# Altium PCB led_matrix_serial.PcbDoc
Units mm, origin at the board's own origin, x right, y up, seen from the top; angles counter-clockwise.
Board outline 70 x 57 mm, 2 copper layers (Top Layer, Bottom Layer); 36 components, 74 nets, 243 pads, 64 vias.
Unrouted connection lines stored in the file: 21.
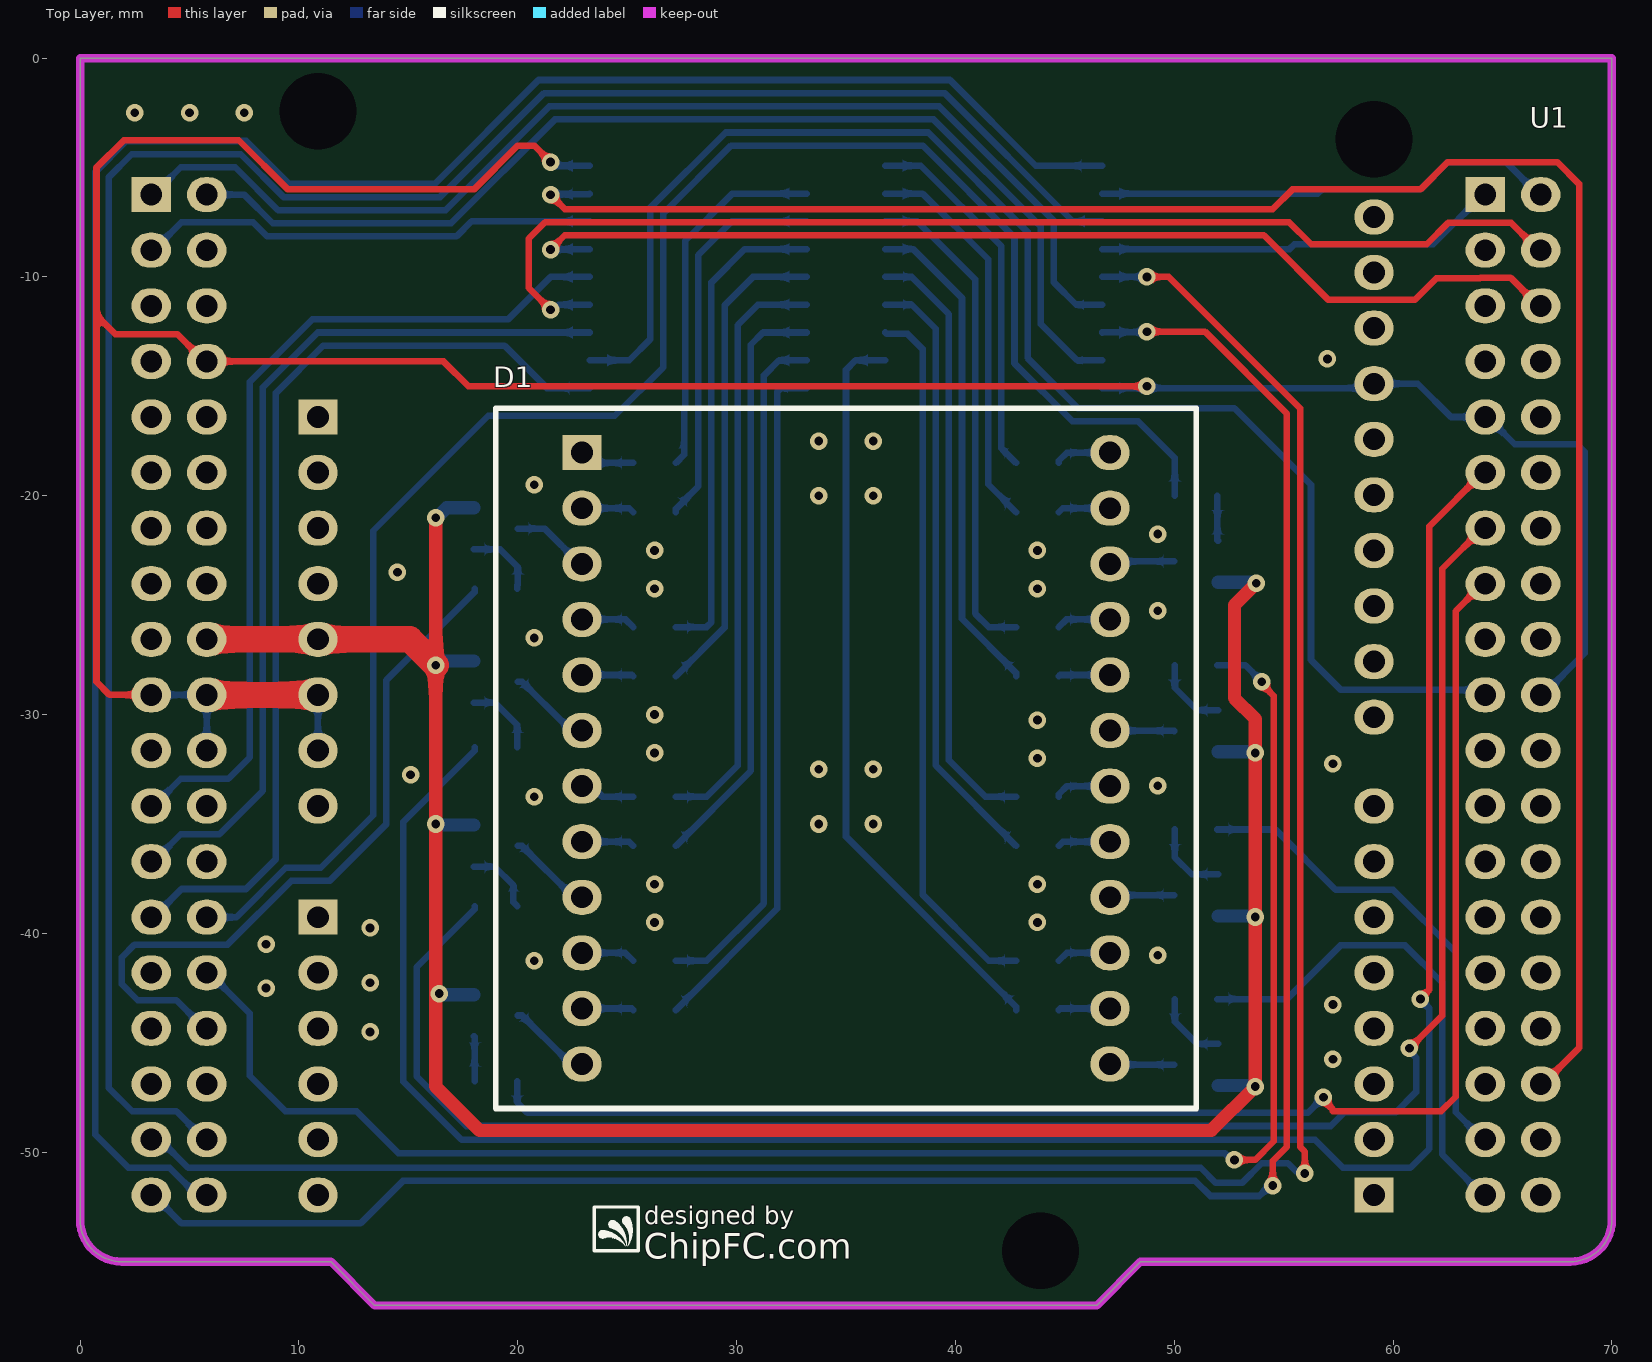
[diagram p0: Top Layer view]
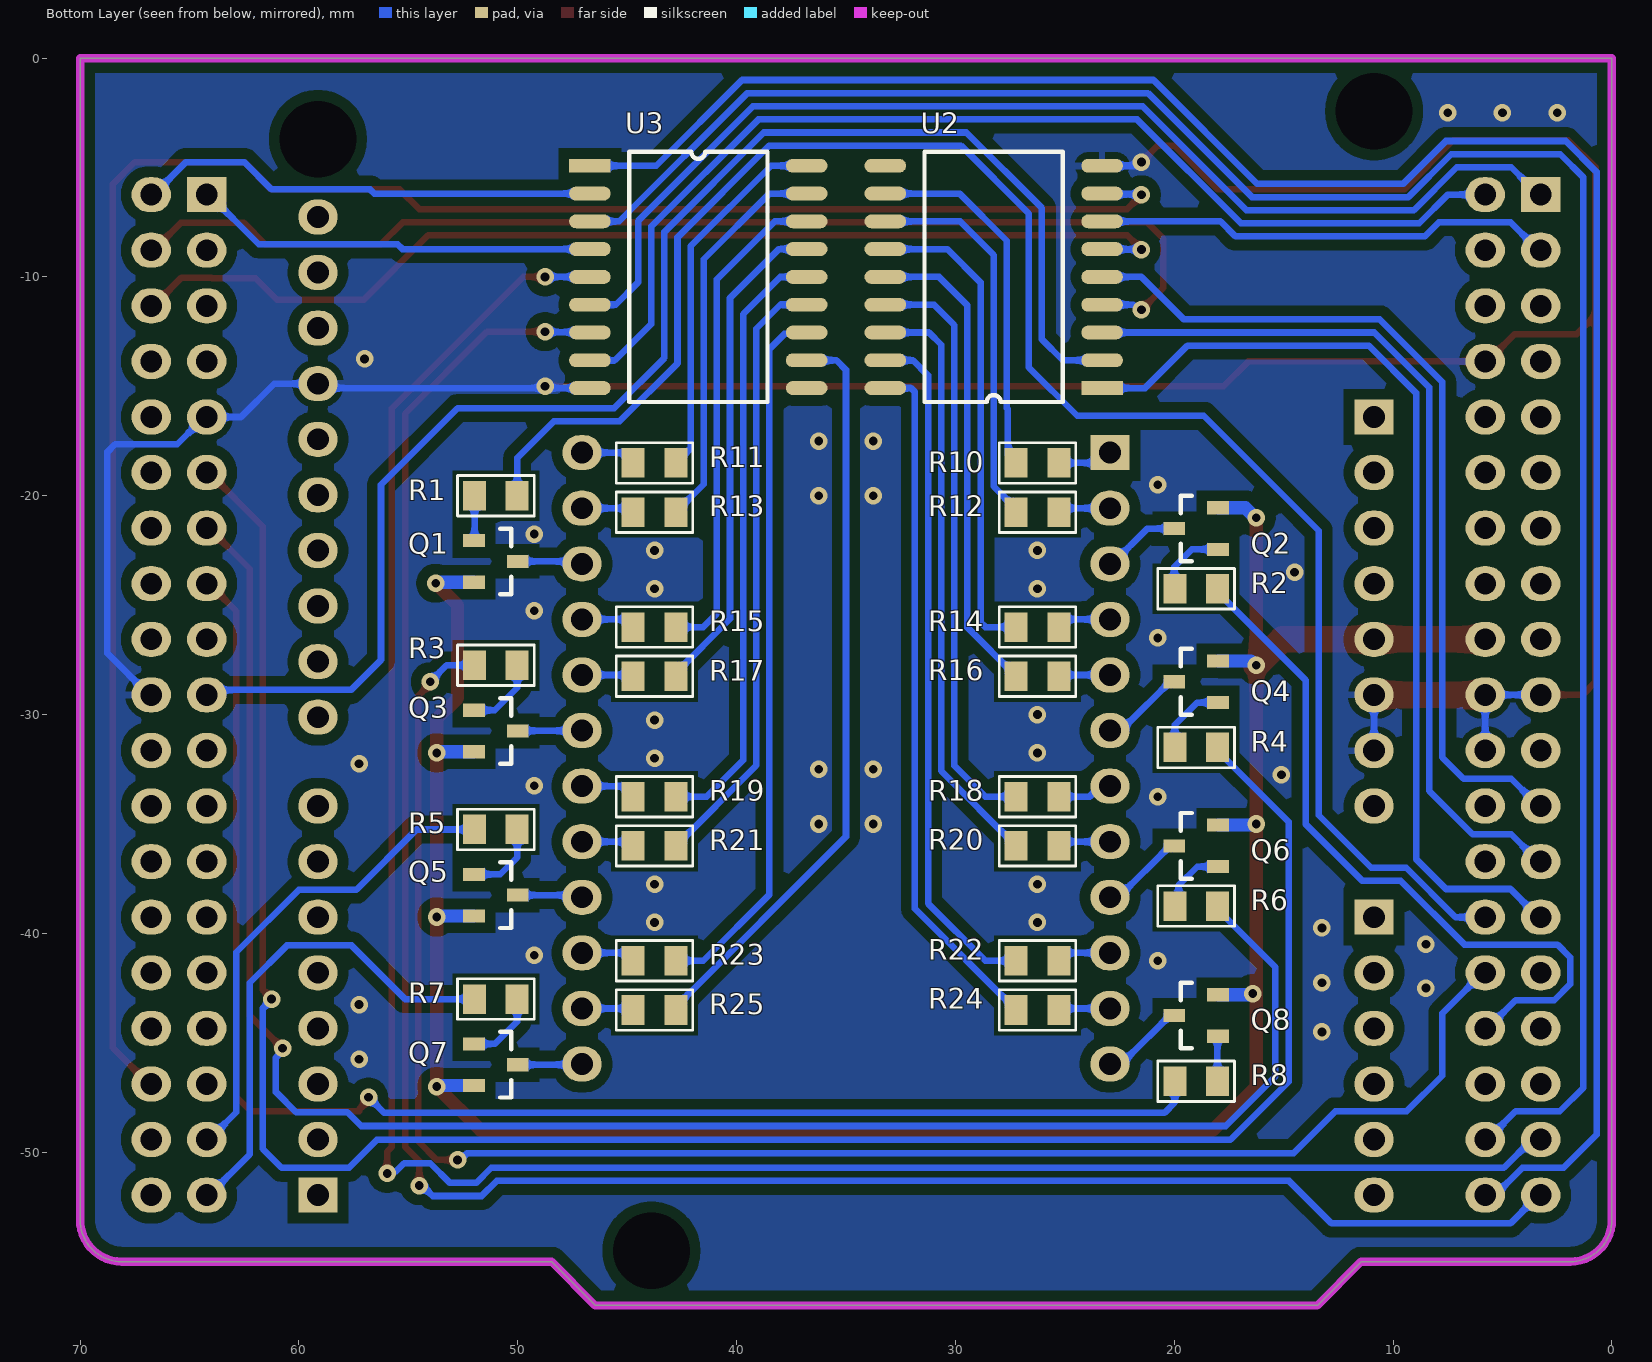
[diagram p1: Bottom Layer view, seen from below]
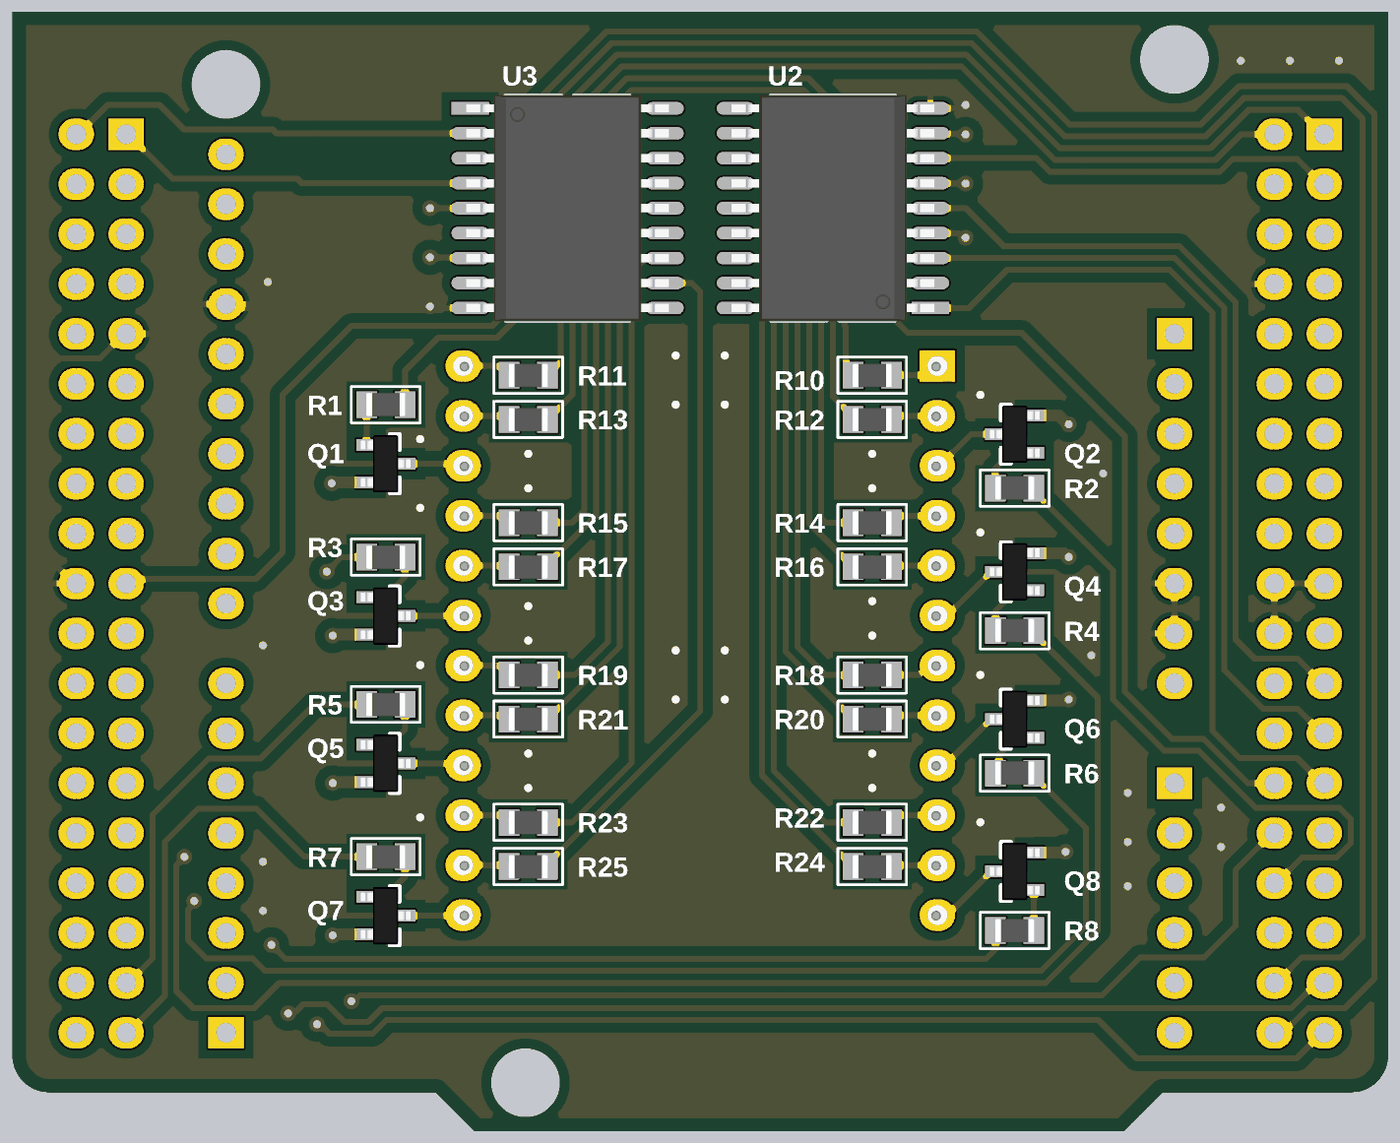
[diagram p2: 3D render of the assembled board from below, using the file's embedded part models]

## Layer stack, top to bottom
Top Solder: solder mask 0.0102, Solder Resist, Dk 3.5
Top Layer: signal copper 0.0356
Dielectric 1: dielectric 0.32, FR-4, Dk 4.8
Bottom Layer: signal copper 0.0356
Bottom Solder: solder mask 0.0102, Solder Resist, Dk 3.5

## Board outline
1.905,-55 11.46,-55 13.46,-57 46.46,-57 48.46,-55 68.095,-55 ccw(c68.095,-53.095) 70,-53.095 70,0 0,0 0,-53.095 ccw(c1.905,-53.095)

## Design rules (kind name [scope] priority, off if disabled: settings)
Clearance Clearance_3 [InComponent('H*')] p1: gap=0 ignorepadtopadclearanceinfootprint=FALSE
Clearance Clearance_2 [InNet('ACL*') OR InNet('ACN*')] p2: gap=0.35 ignorepadtopadclearanceinfootprint=FALSE except(0: Arc-Hole Track-Hole SMDPad-Hole THPad-Hole Via-Hole Fill-Hole Poly-Hole Region-Hole Text-Hole)
Clearance Clearance_1 [InPolygon] p3: gap=0.5 ignorepadtopadclearanceinfootprint=FALSE except(0: Arc-Hole Track-Hole SMDPad-Hole THPad-Hole Via-Hole Fill-Hole Poly-Hole Region-Hole Text-Hole)
Clearance [All] p4: gap=0.3 ignorepadtopadclearanceinfootprint=FALSE except(0: Arc-Hole Track-Hole SMDPad-Hole THPad-Hole Via-Hole Fill-Hole Poly-Hole Region-Hole Text-Hole)
ComponentClearance ComponentClearance_1 [InComponent('U1')] p1: gap=0 collisioncheckmode=3 verticalgap=0 showdistances=FALSE
ComponentClearance [All] p2: gap=0.254 collisioncheckmode=3 verticalgap=0.254 showdistances=FALSE
Height [All] p1: minheight=0 maxheight=30 prefheight=12.7
PolygonConnect PolygonConnect_1 [IsVia] p1: connectstyle=Direct reliefconductorwidth=0.254 reliefentries=4 polygonreliefangle="90 Angle" airgapwidth=0.254
PolygonConnect PolygonConnect_2 [InNet('GND')] p2: connectstyle=Relief reliefconductorwidth=0.3 reliefentries=4 polygonreliefangle="90 Angle" airgapwidth=0.3
PolygonConnect [All] p3: connectstyle=Relief reliefconductorwidth=0.381 reliefentries=4 polygonreliefangle="90 Angle" airgapwidth=0.635
RoutingVias [All] p1: holewidth=0.4 width=0.8 viastyle="Through Hole" minholewidth=0.3 minwidth=0.6 maxholewidth=2 maxwidth=5
SolderMaskExpansion [All] p1: expansion=0.102
Width [All] p1: maxlimit=50 minlimit=0.2 preferedwidth=0.3
28 further rules are at their usual default settings.

## Components (designator, comment, footprint, x,y, rotation, side; value= is the part's Value field where it differs from the comment)
D1 "1388AURG" LED/MATRIX/1388 35,-32 r270 top locked
Q1 "Transistor PNP" SOT-23 51,-23 r180 bottom
Q2 "Transistor PNP" SOT-23 19,-21.5 r0 bottom
Q3 "Transistor PNP" SOT-23 51,-30.75 r180 bottom
Q4 "Transistor PNP" SOT-23 19,-28.5 r0 bottom
Q5 "Transistor PNP" SOT-23 51,-38.25 r180 bottom
Q6 "Transistor PNP" SOT-23 19,-36 r0 bottom
Q7 "Transistor PNP" SOT-23 51,-46 r180 bottom
Q8 "Transistor PNP" SOT-23 19,-43.75 r0 bottom
R1 "4.7K" "R 0805" 51,-20 r0 bottom
R2 "4.7K" "R 0805" 19,-24.25 r0 bottom
R3 "4.7K" "R 0805" 51,-27.75 r180 bottom
R4 "4.7K" "R 0805" 19,-31.5 r0 bottom
R5 "4.7K" "R 0805" 51,-35.25 r180 bottom
R6 "4.7K" "R 0805" 19,-38.75 r0 bottom
R7 "4.7K" "R 0805" 51,-43 r180 bottom
R8 "4.7K" "R 0805" 19,-46.75 r180 bottom
R10 "330" "R 0805" 26.25,-18.5 r180 bottom
R11 "330" "R 0805" 43.75,-18.5 r180 bottom
R12 "470" "R 0805" 26.25,-20.75 r180 bottom
R13 "470" "R 0805" 43.75,-20.75 r180 bottom
R14 "330" "R 0805" 26.25,-26 r180 bottom
R15 "330" "R 0805" 43.75,-26 r180 bottom
R16 "470" "R 0805" 26.25,-28.25 r180 bottom
R17 "470" "R 0805" 43.75,-28.25 r180 bottom
R18 "330" "R 0805" 26.25,-33.75 r180 bottom
R19 "330" "R 0805" 43.75,-33.75 r180 bottom
R20 "470" "R 0805" 26.25,-36 r180 bottom
R21 "470" "R 0805" 43.75,-36 r180 bottom
R22 "330" "R 0805" 26.25,-41.25 r180 bottom
R23 "330" "R 0805" 43.75,-41.25 r180 bottom
R24 "470" "R 0805" 26.25,-43.5 r180 bottom
R25 "470" "R 0805" 43.75,-43.5 r180 bottom
U1 "NUCLEO-F103RB" NUCLEO 0,-55 r0 top locked
U2 "ULN2803" "SOP 18 50p" 28.25,-10 r0 bottom
U3 "ULN2803" "SOP 18 50p" 41.75,-10 r180 bottom

## Footprints (in the part's own frame and the unit in brackets; to place one, negate y for a bottom-side part, rotate by r counter-clockwise, add the part's x,y. Pads: shape width x height; smd on the part's side, far side on the other; paste and mask are expansions set on the pad)
LED/MATRIX/1388 [mm]
  rect 1.6x1.8 hole 1: 1(-13.97,-12.065)
  oval 1.6x1.8 hole 1: 2(-11.43,-12.065) 3(-8.89,-12.065) 4(-6.35,-12.065) 5(-3.81,-12.065) 6(-1.27,-12.065) 7(1.27,-12.065) 8(3.81,-12.065) 9(6.35,-12.065) 10(8.89,-12.065) 11(11.43,-12.065) 12(13.97,-12.065) 13(13.97,12.065) 14(11.43,12.065) 15(8.89,12.065) 16(6.35,12.065) 17(3.81,12.065) 18(1.27,12.065) 19(-1.27,12.065) 20(-3.81,12.065) 21(-6.35,12.065) 22(-8.89,12.065) 23(-11.43,12.065) 24(-13.97,12.065)
  silkscreen extent -16,-16 16,16, body extent -16,-16 16,16, height 8
NUCLEO [mm]
  oval 1.8x1.6 hole 1: A5_1(59.13,24.88) A5_2(59.13,27.42) A5_3(59.13,29.96) A5_4(59.13,32.5) A5_5(59.13,35.04) A5_6(59.13,37.58) A5_7(59.13,40.12) A5_8(59.13,42.66) A5_9(59.13,45.2) A5_10(59.13,47.74) A6_2(10.87,36.06) A6_3(10.87,33.52) A6_4(10.87,30.98) A6_5(10.87,28.44) A6_6(10.87,25.9) A6_7(10.87,23.36) A6_8(10.87,20.82) A8_2(10.87,13.2) A8_3(10.87,10.66) A8_4(10.87,8.12) A8_5(10.87,5.58) A8_6(10.87,3.04) A9_2(59.13,5.58) A9_3(59.13,8.12) A9_4(59.13,10.66) A9_5(59.13,13.2) A9_6(59.13,15.74) A9_7(59.13,18.28) A9_8(59.13,20.82) M7_2(5.79,48.76) M7_3(3.25,46.22) M7_4(5.79,46.22) M7_5(3.25,43.68) M7_6(5.79,43.68) M7_7(3.25,41.14) M7_8(5.79,41.14) M7_9(3.25,38.6) M7_10(5.79,38.6) M7_11(3.25,36.06) M7_12(5.79,36.06) M7_13(3.25,33.52) M7_14(5.79,33.52) M7_15(3.25,30.98) M7_16(5.79,30.98) M7_17(3.25,28.44) M7_18(5.79,28.44) M7_19(3.25,25.9) M7_20(5.79,25.9) M7_21(3.25,23.36) M7_22(5.79,23.36) M7_23(3.25,20.82) M7_24(5.79,20.82) M7_25(3.25,18.28) M7_26(5.79,18.28) M7_27(3.25,15.74) M7_28(5.79,15.74) M7_29(3.25,13.2) M7_30(5.79,13.2) M7_31(3.25,10.66) M7_32(5.79,10.66) M7_33(3.25,8.12) M7_34(5.79,8.12) M7_35(3.25,5.58) M7_36(5.79,5.58) M7_37(3.25,3.04) M7_38(5.79,3.04) M10_2(66.75,48.76) M10_3(64.21,46.22) M10_4(66.75,46.22) M10_5(64.21,43.68) M10_6(66.75,43.68) M10_7(64.21,41.14) M10_8(66.75,41.14) M10_9(64.21,38.6) M10_10(66.75,38.6) M10_11(64.21,36.06) M10_12(66.75,36.06) M10_13(64.21,33.52) M10_14(66.75,33.52) M10_15(64.21,30.98) M10_16(66.75,30.98) M10_17(64.21,28.44) M10_18(66.75,28.44) M10_19(64.21,25.9) M10_20(66.75,25.9) M10_21(64.21,23.36) M10_22(66.75,23.36) M10_23(64.21,20.82) M10_24(66.75,20.82) M10_25(64.21,18.28) M10_26(66.75,18.28) M10_27(64.21,15.74) M10_28(66.75,15.74) M10_29(64.21,13.2) M10_30(66.75,13.2) M10_31(64.21,10.66) M10_32(66.75,10.66) M10_33(64.21,8.12) M10_34(66.75,8.12) M10_35(64.21,5.58) M10_36(66.75,5.58) M10_37(64.21,3.04) M10_38(66.75,3.04)
  rect 1.8x1.6 hole 1: A6_1(10.87,38.6) A8_1(10.87,15.74) A9_1(59.13,3.04) M7_1(3.25,48.76) M10_1(64.21,48.76)
  round 0 hole 3.5 unplated: HOLD(10.87,52.57) HOLD(43.89,0.5) HOLD(59.13,51.3)
  Keep-Out Layer lines w0.381: 0,1.905 ccw(c1.905,1.905) 1.905,0 11.46,0 13.46,-2 46.46,-2 48.46,0 68.095,0 ccw(c68.095,1.905) 70,1.905 70,55 0,55 0,1.905
"R 0805" [mm] "Chip Resistor, 2-Leads, Body 2.0x1.3mm, IPC Medium Density"
  rect 1.05x1.35 smd: 1(-0.975,0) 2(0.975,0)
  silkscreen extent -1.75,-0.92 1.75,0.92, body extent -1,-0.61 1,0.59, height 0.5
"SOP 18 50p" [mil]
  rect 75x25 smd: 1(-195,200)
  oval 75x25 smd: 2(-195,150) 3(-195,100) 4(-195,50) 5(-195,0) 6(-195,-50) 7(-195,-100) 8(-195,-150) 9(-195,-200) 10(195,-200) 11(195,-150) 12(195,-100) 13(195,-50) 14(195,0) 15(195,50) 16(195,100) 17(195,150) 18(195,200)
  silkscreen extent -124,-225 124,225, body extent -203,-227 203,227, height 104
SOT-23 [mm] "SOT23, 3-Leads, Body 3.0x2.5mm (max), Pitch 0.95mm, IPC Medium Density"
  rect 1x0.6 smd: 1(-1,0.95) 2(-1,-0.95) 3(1,0)
  silkscreen extent 0.2,-1.5 0.7,1.5, body extent -1.28,-1.46 1.27,1.46, height 0.95

## Part data
D1: library part "LED MATRIX 1388AURG", "1388AURG, Common-Anode, LED Matrix 8x8, RED-GREEN, 32x32mm"
Q1 Q2 Q3 Q4 Q5 Q6 Q7 Q8: "PNP Bipolar Transistor"
R1 R2 R3 R4 R5 R6 R7 R8 R10 R11 R12 R13 R14 R15 R16 R17 R18 R19 R20 R21 R22 R23 R24 R25: library part Resistor, "Resistor"
U1: "STM32F103RB, mbed-Enabled Development Nucleo-64 STM32F1 ARM® Cortex®-M3 MCU 32-Bit Embedded Evaluation Board", Manufacturer=STMicroelectronics, BRAND=STMicroelectronics, Manufacturer Product Number=NUCLEO-F103RB, PART NO=NUCLEO-F103RB, STOCK CODE=497-14362-ND, SUPPLIER=digi-key, TYPE="EVAL BRD"
U2 U3: "TRANS 8NPN DARL 50V 0.5A 18SO", PACKAGE=18-SOIC, PART NO=ULN2803ADWR, BRAND=TI, STOCK CODE=296-15777-1-ND, SUPPLIER=Digi-Key, TYPE=SMD

## Via types
v1: diameter 0.8, hole 0.4, Top Layer to Bottom Layer, tented both sides, 64 vias

## Nets (pads, with @x,y where several pads share a name; then routed paths per layer and width w, separated by ;. In a path a pad name is that pad's centre, name@x,y a point inside that pad or via, vN(x,y) a via of type N, cw(c..) or ccw(c..) an arc to the next point about the centre after c; other vN are vias at no path point)
+5V: Q1.2 Q2.2 Q3.2 Q4.2 Q5.2 Q6.2 Q7.2 Q8.2 U1.A6_5 U1.M7_18 | length 114.1
  Top Layer w0.6: v1(16.25,-21) v1(16.25,-27.75) v1(16.25,-35) v1@16.25,-42.75 ; v1(16.412,-42.75) v1@16.25,-42.75 ; v1(53.75,-24) 52.75,-25 52.75,-29.25 53.7,-30.2 v1(53.7,-31.75) v1(53.7,-39.25) v1(53.7,-47) 51.7,-49 18.25,-49 16.25,-47 v1@16.25,-42.75
  Top Layer w1.2: U1.M7_18 U1.A6_5 15.06,-26.56 v1(16.25,-27.75)
  Bottom Layer w0.6: v1(16.25,-35) 16.304,-35 16.354,-35.05 Q6.2 ; v1(16.25,-27.75) 16.304,-27.75 16.504,-27.55 Q4.2 ; v1(16.25,-21) 16.304,-21 16.754,-20.55 Q2.2 ; v1(16.412,-42.75) 16.412,-42.8 Q8.2 ; Q7.2 53.596,-46.95 53.646,-47 v1(53.7,-47) ; Q5.2 53.596,-39.2 53.646,-39.25 v1(53.7,-39.25) ; Q3.2 53.596,-31.7 53.646,-31.75 v1(53.7,-31.75) ; Q1.2 53.646,-23.95 53.696,-24 v1(53.75,-24)
CG1: U1.M7_38 U3.1 | length 101.2
  Bottom Layer w0.3: U1.M7_38 5.338,-51.96 4.088,-50.71 2.21,-50.71 0.7,-49.2 0.7,-5.201 2.111,-3.79 7.586,-3.79 9.546,-5.75 16.204,-5.75 20.954,-1 39.75,-1 43.67,-4.92 U3.1
CG2: U1.M7_36 U3.3 | length 98.1
  Bottom Layer w0.3: U1.M7_36 5.69,-49.42 4.4,-48.13 2.38,-48.13 1.3,-47.05 1.3,-5.45 2.36,-4.39 7.337,-4.39 9.297,-6.35 16.453,-6.35 16.953,-5.85 21.203,-1.6 39.501,-1.6 45.361,-7.46 U3.3
CG3: U1.M7_35 U3.5 | length 100.7
  Top Layer w0.3: v1(48.75,-10) 49.75,-10 55.75,-16 55.75,-49.75 55.968,-49.968 v1(55.968,-50.968)
  Bottom Layer w0.3: U1.M7_35 3.647,-49.42 4.937,-50.71 51.21,-50.71 51.9,-51.4 53.1,-51.4 54,-50.5 55.193,-50.5 55.565,-50.872 55.872,-50.872 v1(55.968,-50.968) ; U3.5 v1(48.75,-10)
CG4: U1.M7_37 U3.7 | length 98.6
  Top Layer w0.3: v1(48.75,-12.5) 51.401,-12.5 55.15,-16.249 55.15,-49.75 54.5,-50.4 v1(54.5,-51.52)
  Bottom Layer w0.3: U1.M7_37 3.35,-51.96 4.64,-53.25 12.81,-53.25 14.75,-51.31 50.961,-51.31 51.651,-52 53.885,-52 54.365,-51.52 v1(54.5,-51.52) ; U3.7 46.723,-12.52 48.73,-12.52 v1(48.75,-12.5)
CG5: U1.M10_34 U2.8 | length 92.3
  Top Layer w0.3: v1(21.5,-6.25) 22.15,-6.9 54.5,-6.9 55.4,-6 61.25,-6 62.5,-4.75 67.5,-4.75 68.5,-5.75 68.5,-45.23 66.85,-46.88 U1.M10_34
  Bottom Layer w0.3: v1(21.5,-6.25) 21.53,-6.22 23.267,-6.22 U2.8
CG6: U1.M10_6 U2.6 | length 49.5
  Top Layer w0.3: v1(21.5,-8.75) 22.15,-8.1 54.1,-8.1 57.05,-11.05 60.99,-11.05 61.97,-10.07 63.96,-10.07 64,-10.03 65.36,-10.03 66.65,-11.32 U1.M10_6
  Bottom Layer w0.3: v1(21.5,-8.75) 21.51,-8.74 23.287,-8.74 U2.6
CG7: U1.M10_4 U2.4 | length 53.5
  Top Layer w0.3: v1(21.5,-11.5) 20.5,-10.5 20.5,-8.25 21.25,-7.5 55.25,-7.5 56.26,-8.51 61.534,-8.51 62.514,-7.53 65.4,-7.53 66.65,-8.78 U1.M10_4
  Bottom Layer w0.3: v1(21.5,-11.5) 21.635,-11.5 21.865,-11.27 U2.4
CG8: U1.M10_19 U2.2 | length 67.4
  Bottom Layer w0.3: U2.2 25.091,-13.81 26.046,-12.855 26.046,-6.855 29.501,-3.4 38.756,-3.4 43.3,-7.944 43.3,-13.701 45.599,-16 52.75,-16 56.25,-19.5 56.25,-27.5 57.62,-28.87 63.98,-28.87 U1.M10_19
CR1: U1.M10_2 U3.2 | length 21.3
  Bottom Layer w0.3: U3.2 56.56,-6.19 56.75,-6 61.25,-6 62.5,-4.75 65.16,-4.75 66.65,-6.24 U1.M10_2
CR2: U1.M10_1 U3.4 | length 18.5
  Bottom Layer w0.3: U3.4 55.27,-8.73 55.49,-8.51 61.84,-8.51 64.11,-6.24 U1.M10_1
CR3: U1.M7_1 U3.6 | length 52.1
  Bottom Layer w0.3: U1.M7_1 3.35,-6.24 4.6,-4.99 7.089,-4.99 9.049,-6.95 16.701,-6.95 21.451,-2.2 39.253,-2.2 44.5,-7.447 44.5,-10.25 45.52,-11.27 U3.6
CR4: U1.M7_2 U3.8 | length 50.6
  Bottom Layer w0.3: U1.M7_2 7.49,-6.24 8.8,-7.55 16.95,-7.55 21.7,-2.8 39.004,-2.8 43.9,-7.696 43.9,-12.15 45.56,-13.81 U3.8
CR5: U1.M7_3 U2.7 | length 21.1
  Bottom Layer w0.3: U1.M7_3 3.35,-8.78 4.63,-7.5 7.901,-7.5 8.551,-8.15 17.199,-8.15 17.889,-7.46 U2.7
CR6: U1.M7_23 U2.5 | length 40.1
  Bottom Layer w0.3: U1.M7_23 3.35,-34.18 4.6,-32.93 6.779,-32.93 7.75,-31.959 7.75,-14.803 10.613,-11.94 19.56,-11.94 21.5,-10 U2.5
CR7: U1.M7_25 U2.3 | length 40.9
  Bottom Layer w0.3: U1.M7_25 3.35,-36.72 4.6,-35.47 6.368,-35.47 8.35,-33.488 8.35,-15.051 10.861,-12.54 U2.3
CR8: U1.M7_27 U2.1 | length 44.1
  Bottom Layer w0.3: U1.M7_27 3.35,-39.26 4.64,-37.97 7.583,-37.97 8.95,-36.603 8.95,-15.3 11.11,-13.14 19.39,-13.14 21.33,-15.08 U2.1
CROW1: R1.1 U1.M7_28 | length 81.6
  Bottom Layer w0.3: U1.M7_28 7.141,-39.26 9.401,-37 11,-37 13.4,-34.6 13.4,-21.6 18.653,-16.347 24.436,-16.347 26.646,-14.137 26.646,-7.104 29.75,-4 38.507,-4 42.7,-8.193 42.7,-13.95 45.35,-16.6 48.35,-16.6 50.025,-18.275 R1.1
CROW2: R3.1 U1.M7_30 | length 78
  Top Layer w0.3: U1.M7_30 U1.M7_30@5.89,-41.8 ; v1(52.75,-50.35) 53.701,-50.35 54.55,-49.501 54.55,-29.152 54,-28.602 v1(54,-28.5)
  Bottom Layer w0.3: U1.M7_30 5.89,-41.8 7.75,-43.66 7.75,-46.5 9.38,-48.13 12.63,-48.13 14.541,-50.041 52.306,-50.041 52.615,-50.35 v1(52.75,-50.35) ; R3.1 53.25,-27.75 v1(54,-28.5)
CROW3: R5.1 U1.M10_35 | length 22.4
  Bottom Layer w0.3: R5.1 54.625,-35.25 57.375,-38 60,-38 62.86,-40.86 62.86,-48.17 64.11,-49.42 U1.M10_35
CROW4: R7.1 U1.M10_37 | length 22.6
  Bottom Layer w0.3: R7.1 55.149,-43 57.599,-40.55 60.55,-40.55 62.25,-42.25 62.25,-50.1 64.11,-51.96 U1.M10_37
CROW5: R2.1 U1.M7_32 | length 33
  Bottom Layer w0.3: U1.M7_32 5.69,-44.34 4.4,-43.05 2.632,-43.05 1.9,-42.318 1.9,-41.1 2.49,-40.51 6.74,-40.51 9.65,-37.6 11.4,-37.6 14,-35 14,-28.425 18.025,-24.4 R2.1
CROW6: R4.1 U1.M10_11 | length 97.8
  Top Layer w0.3: v1(61.25,-43) 61.25,-42.974 61.65,-42.574 61.65,-21.4 64.11,-18.94 U1.M10_11
  Bottom Layer w0.3: R4.1 18.025,-31.65 14.776,-34.899 14.776,-46.776 17.431,-49.431 56.431,-49.431 57.71,-50.71 60.79,-50.71 61.65,-49.85 61.65,-43.426 61.25,-43.026 v1(61.25,-43)
CROW7: R6.1 U1.M10_13 | length 83.5
  Top Layer w0.3: v1(60.75,-45.25) 62.25,-43.75 62.25,-23.34 64.11,-21.48 U1.M10_13
  Bottom Layer w0.3: R6.1 18.025,-38.9 15.376,-41.549 15.376,-46.527 17.649,-48.8 57.152,-48.8 57.782,-48.17 60.13,-48.17 61.05,-47.25 61.05,-45.676 60.75,-45.376 v1(60.75,-45.25)
CROW8: R8.1 U1.M10_15 | length 69.1
  Top Layer w0.3: v1(56.818,-47.484) 56.818,-47.619 57.25,-48.051 57.25,-48.13 62.194,-48.13 62.86,-47.464 62.86,-25.27 64.11,-24.02 U1.M10_15
  Bottom Layer w0.3: R8.1 19.975,-47.725 20.45,-48.2 56.102,-48.2 v1(56.818,-47.484)
G1: R11.2 U3.18 | length 17
  Bottom Layer w0.3: U3.18 38.42,-4.92 42.1,-8.6 42.1,-17.825 R11.2
G2: R15.2 U3.16 | length 22.6
  Bottom Layer w0.3: U3.16 38.25,-7.46 40.9,-10.11 40.9,-25.376 41.524,-26 R15.2
G3: R19.2 U3.14 | length 27.8
  Bottom Layer w0.3: U3.14 38,-10 39.7,-11.7 39.7,-32.076 41.374,-33.75 R19.2
G4: R23.2 U3.12 | length 32.5
  Bottom Layer w0.3: U3.12 36.861,-12.604 37.814,-12.604 38.5,-13.29 38.5,-38.226 41.524,-41.25 R23.2
G5: R10.1 U2.11 | length 16.8
  Bottom Layer w0.3: R10.1 27.6,-18.125 27.6,-16.05 27.65,-16 27.65,-8.35 29.81,-6.19 U2.11
G6: R14.1 U2.13 | length 22.2
  Bottom Layer w0.3: R14.1 28.626,-26 28.85,-25.776 28.85,-10.25 30.37,-8.73 U2.13
G7: R18.1 U2.15 | length 27.1
  Bottom Layer w0.3: R18.1 28.626,-33.75 30.05,-32.326 30.05,-12.2 30.98,-11.27 U2.15
G8: R22.1 U2.17 | length 31.5
  Bottom Layer w0.3: R22.1 28.626,-41.25 31.25,-38.626 31.25,-14.5 31.94,-13.81 U2.17
GND: U1.A5_7 U1.A6_6 U1.A6_7 U1.M7_8 U1.M7_19 U1.M7_20 U1.M7_22 U1.M10_9 U1.M10_20 U2.9 U3.9 | length 148.9
  Top Layer w0.3: U1.M7_19 1.35,-29.1 0.75,-28.5 0.75,-11.75 ; v1(21.5,-4.75) 20.75,-4 20,-4 18,-6 9.5,-6 7.25,-3.75 2,-3.75 0.75,-5 0.75,-11.75 ; v1(48.75,-15) 17.75,-15 16.61,-13.86 5.69,-13.86 4.44,-12.61 1.61,-12.61 0.75,-11.75
  Top Layer w1.2: U1.M7_20 U1.A6_6
  Bottom Layer w0.3: U1.M7_19 U1.M7_20 U1.M7_22 ; U1.A6_7 U1.A6_6 ; v1(21.5,-4.75) 21.635,-4.75 21.805,-4.92 U2.9 ; U3.9 58.93,-15.08 U1.A5_7 61.13,-14.88 62.65,-16.4 U1.M10_9 64.31,-16.4 65.56,-17.65 68.4,-17.65 68.75,-18 68.75,-27.2 66.85,-29.1 U1.M10_20
  other v1: 57.25,-45.75 13.25,-44.5 57.25,-43.25 8.5,-42.5 13.25,-42.25 20.75,-41.25 49.25,-41 8.5,-40.5 13.25,-39.75 26.25,-39.5 43.75,-39.5 26.25,-37.75 43.75,-37.75 33.75,-35 36.25,-35 20.75,-33.75 49.25,-33.25 15.1,-32.75 33.75,-32.5 36.25,-32.5 57.25,-32.25 43.75,-32 26.25,-31.75 43.75,-30.25 26.25,-30 20.75,-26.5 49.25,-25.25 26.25,-24.25 43.75,-24.25 14.5,-23.5 26.25,-22.5 43.75,-22.5 49.25,-21.75 33.75,-20 36.25,-20 20.75,-19.5 33.75,-17.5 36.25,-17.5 57,-13.75 2.5,-2.5 5,-2.5 7.5,-2.5
NetD1_1: D1.1 R10.2 | length 2.5
  Bottom Layer w0.3: D1.1 23.405,-18.5 R10.2
NetD1_2: D1.2 R12.2 | length 2.4
  Bottom Layer w0.3: D1.2 25.095,-20.57 R12.2
NetD1_4: D1.4 R14.2 | length 2.5
  Bottom Layer w0.3: D1.4 24.925,-25.65 R14.2
NetD1_5: D1.5 R16.2 | length 2.4
  Bottom Layer w0.3: D1.5 25.215,-28.19 R16.2
NetD1_7: D1.7 R18.2 | length 2.5
  Bottom Layer w0.3: D1.7 23.387,-33.27 23.867,-33.75 R18.2
NetD1_8: D1.8 R20.2 | length 2.4
  Bottom Layer w0.3: D1.8 25.085,-35.81 R20.2
NetD1_10: D1.10 R22.2 | length 2.5
  Bottom Layer w0.3: D1.10 24.915,-40.89 R22.2
NetD1_11: D1.11 R24.2 | length 2.4
  Bottom Layer w0.3: D1.11 25.205,-43.43 R24.2
NetD1_14: D1.14 R25.1 | length 2.4
  Bottom Layer w0.3: R25.1 44.795,-43.43 D1.14
NetD1_15: D1.15 R23.1 | length 2.5
  Bottom Layer w0.3: R23.1 45.085,-40.89 D1.15
NetD1_17: D1.17 R21.1 | length 2.4
  Bottom Layer w0.3: R21.1 44.915,-35.81 D1.17
NetD1_18: D1.18 R19.1 | length 2.6
  Bottom Layer w0.3: R19.1 44.725,-33.645 45.1,-33.27 D1.18
NetD1_20: D1.20 R17.1 | length 2.4
  Bottom Layer w0.3: R17.1 44.785,-28.19 D1.20
NetD1_21: D1.21 R15.1 | length 2.5
  Bottom Layer w0.3: R15.1 45.075,-25.65 D1.21
NetD1_23: D1.23 R13.1 | length 2.4
  Bottom Layer w0.3: R13.1 44.905,-20.57 D1.23
NetD1_24: D1.24 R11.1 | length 2.6
  Bottom Layer w0.3: R11.1 44.725,-18.405 45.1,-18.03 D1.24
NetQ1_1: Q1.1 R1.2 | length 2.1
  Bottom Layer w0.3: R1.2 51.975,-22.025 Q1.1
NetQ2_1: Q2.1 R2.2 | length 3.3
  Bottom Layer w0.3: Q2.1 19.2,-22.45 20,-23.25 20,-24.075 19.975,-24.1 R2.2
NetQ3_1: Q3.1 R3.2 | length 3.4
  Bottom Layer w0.3: R3.2 50.025,-28.775 51.05,-29.8 Q3.1
NetQ4_1: Q4.1 R4.2 | length 3.4
  Bottom Layer w0.3: Q4.1 18.95,-29.45 19.975,-30.475 R4.2
NetQ5_1: Q5.1 R5.2 | length 3.6
  Bottom Layer w0.3: R5.2 50.025,-36.525 50.8,-37.3 Q5.1
NetQ6_1: Q6.1 R6.2 | length 3.2
  Bottom Layer w0.3: Q6.1 18.95,-36.95 19.801,-37.801 19.801,-38.576 R6.2
NetQ7_1: Q7.1 R7.2 | length 3.4
  Bottom Layer w0.3: R7.2 50.025,-44.025 51.05,-45.05 Q7.1
NetQ8_1: Q8.1 R8.2 | length 2.1
  Bottom Layer w0.3: Q8.1 18.025,-44.725 R8.2
R1: R13.2 U3.17 | length 18
  Bottom Layer w0.3: U3.17 38.493,-6.19 41.5,-9.197 41.5,-19.475 R13.2
R2: R17.2 U3.15 | length 22.7
  Bottom Layer w0.3: U3.15 38.066,-8.73 40.3,-10.964 40.3,-25.625 42.775,-28.1 R17.2
R3: R21.2 U3.13 | length 27.9
  Bottom Layer w0.3: U3.13 38,-11.27 39.1,-12.37 39.1,-32.325 R21.2
R4: R25.2 U3.11 | length 34.4
  Bottom Layer w0.3: U3.11 35.44,-13.81 35,-14.25 35,-35.575 42.775,-43.35 R25.2
R5: R12.1 U2.12 | length 17.8
  Bottom Layer w0.3: R12.1 27.225,-20.6 28.25,-19.575 28.25,-9 29.79,-7.46 U2.12
R6: R16.1 U2.14 | length 22.2
  Bottom Layer w0.3: R16.1 29.45,-26.025 29.45,-11.3 30.75,-10 U2.14
R7: R20.1 U2.16 | length 27.1
  Bottom Layer w0.3: R20.1 30.65,-32.575 30.65,-13.1 31.21,-12.54 U2.16
R8: R24.1 U2.18 | length 31.6
  Bottom Layer w0.3: R24.1 31.85,-38.875 31.85,-15.256 32.026,-15.08 U2.18
ROW1: D1.22 Q1.3 | length 3
  Bottom Layer w0.3: D1.22 47.175,-23 Q1.3
ROW2: D1.19 Q3.3 | length 2.9
  Bottom Layer w0.3: D1.19 47.075,-30.74 49.99,-30.74 Q3.3
ROW3: D1.16 Q5.3 | length 3
  Bottom Layer w0.3: D1.16 47.165,-38.25 Q5.3
ROW4: D1.13 Q7.3 | length 2.9
  Bottom Layer w0.3: D1.13 47.095,-46 Q7.3
ROW5: D1.3 Q2.3 | length 3.6
  Bottom Layer w0.3: Q2.3 21.225,-21.5 22.835,-23.11 D1.3
ROW6: D1.6 Q4.3 | length 3.9
  Bottom Layer w0.3: Q4.3 20.2,-28.5 22.181,-30.481 22.686,-30.481 D1.6
ROW7: D1.9 Q6.3 | length 3.9
  Bottom Layer w0.3: Q6.3 20.2,-36 22.55,-38.35 D1.9
ROW8: D1.12 Q8.3 | length 3.9
  Bottom Layer w0.3: Q8.3 20.2,-43.75 22.171,-45.721 22.686,-45.721 D1.12
pads on no net: U1.A5_1 U1.A5_2 U1.A5_3 U1.A5_4 U1.A5_5 U1.A5_6 U1.A5_8 U1.A5_9 U1.A5_10 U1.A6_1 U1.A6_2 U1.A6_3 U1.A6_4 U1.A6_8 U1.A8_1 U1.A8_2 U1.A8_3 U1.A8_4 U1.A8_5 U1.A8_6 U1.A9_1 U1.A9_2 U1.A9_3 U1.A9_4 U1.A9_5 U1.A9_6 U1.A9_7 U1.A9_8 U1.HOLD U1.M7_4 U1.M7_5 U1.M7_6 U1.M7_7 U1.M7_9 U1.M7_10 U1.M7_11 U1.M7_12 U1.M7_13 U1.M7_14 U1.M7_15 U1.M7_16 U1.M7_17 U1.M7_21 U1.M7_24 U1.M7_26 U1.M7_29 U1.M7_31 U1.M7_33 U1.M7_34 U1.M10_3 U1.M10_5 U1.M10_7 U1.M10_8 U1.M10_10 U1.M10_12 U1.M10_14 U1.M10_16 U1.M10_17 U1.M10_18 U1.M10_21 U1.M10_22 U1.M10_23 U1.M10_24 U1.M10_25 U1.M10_26 U1.M10_27 U1.M10_28 U1.M10_29 U1.M10_30 U1.M10_31 U1.M10_32 U1.M10_33 U1.M10_36 U1.M10_38 U2.10 U3.10

## Polygon pours and split planes (outlines as drawn)
GND on Top Layer "top" (solid, remove dead copper, pour order 1): 16.5,67.75 76.75,78.06 76.75,21.06 6.75,21.06
GND on Bottom Layer "bot" (solid, remove dead copper, pour order 0): 0,0 70,0 70,-57 0,-57

## Silkscreen, mask and mechanical layers (free items; w line width, h text height)
Top Overlay:
  drawing of 7 lines, arcs and shapes, not listed
  text "designed by" at 25.778,-53.555 h1.4
  text "ChipFC.com" at 25.75,-55.25 h2

## Dimensions
0,-53.095 to 70,-53.095 on Mechanical 16
70,0 to 46.46,-57 on Mechanical 16